# Altium PCB Neon-Demon-Earing-panel-revA.PcbDoc
Units mm, origin at the board's own origin, x right, y up, seen from the top; angles counter-clockwise.
Board outline 1.18 x 1.18 mm, 2 copper layers (Top Layer, Bottom Layer); 28 components, 6 nets, 76 pads, 20 vias.
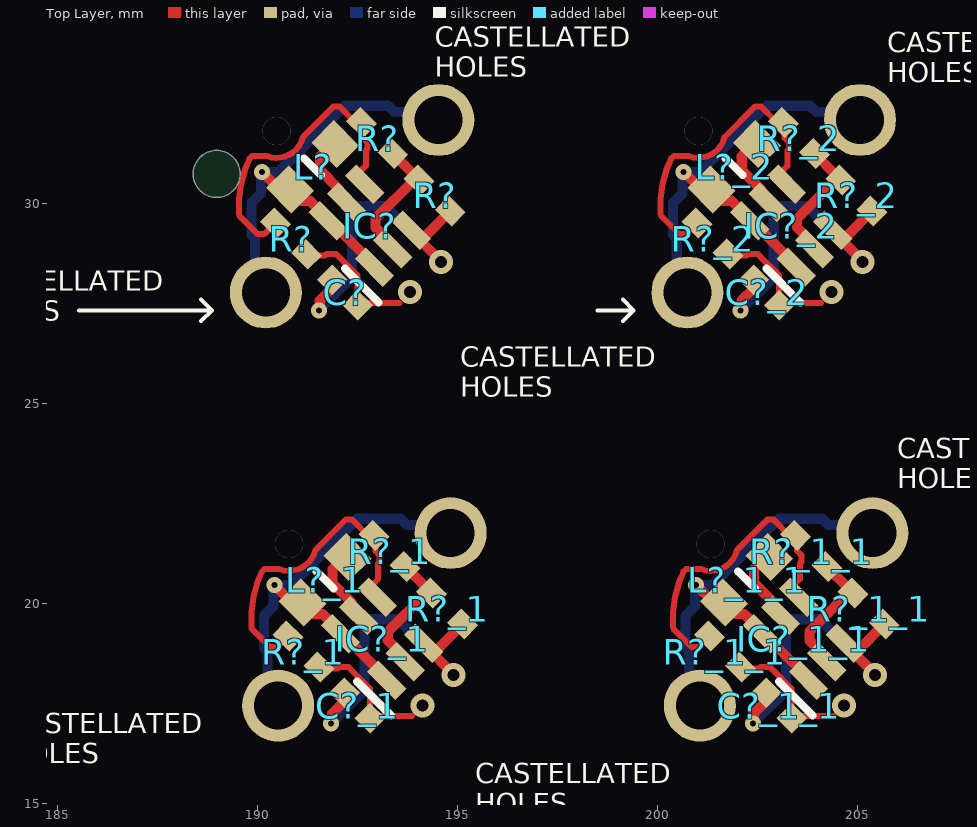
[diagram p0: Top Layer view]
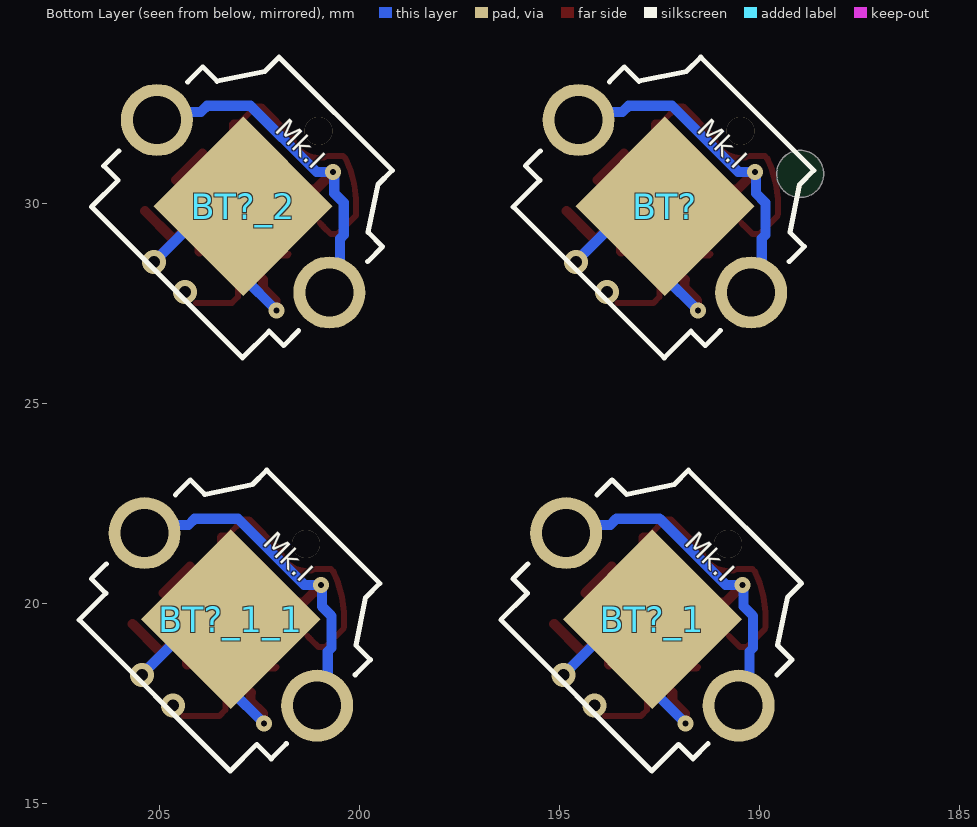
[diagram p1: Bottom Layer view, seen from below]

## Layer stack, top to bottom
Top Solder: solder mask 0.0102, Solder Resist, Dk 3.5
Top Layer: signal copper 0.0356
Dielectric 1: dielectric 0.32, FR-4, Dk 4.8
Bottom Layer: signal copper 0.0356
Bottom Solder: solder mask 0.0102, Solder Resist, Dk 3.5

## Board outline
188.386,30.734 ccw(c188.974,30.734) 188.974,30.146 ccw(c188.974,30.734) 189.562,30.734 ccw(c188.974,30.734) 188.974,31.322 ccw(c188.974,30.734)

## Design rules (kind name [scope] priority, off if disabled: settings)
BoardOutlineClearance [All] p1: gap=0.2 ignorepadtopadclearanceinfootprint=FALSE
Clearance [All] p1: gap=0.127 ignorepadtopadclearanceinfootprint=FALSE except(0.25: Arc-Hole Track-Hole SMDPad-Hole THPad-Hole Via-Hole Fill-Hole Poly-Hole Region-Hole Text-Hole)
ComponentClearance [All] p1: gap=0.127 collisioncheckmode=3 verticalgap=0.127 showdistances=TRUE
DiffPairsRouting [All] p1: maxlimit=0.254 minlimit=0.127 mostfreqgap=0.127 toplayer_minwidth=0.127 toplayer_maxwidth=25.4 toplayer_prefwidth=0.127 bottomlayer_minwidth=0.127 bottomlayer_maxwidth=25.4 bottomlayer_prefwidth=0.127 maxuncoupledlength=12.7
Height [All] p1: minheight=0 maxheight=1816.048 prefheight=12.7
HoleSize [All] p1: absolutevalues=TRUE maxlimit=6.3 minlimit=0.3 maxpercent=80.000 minpercent=20.000
HoleToHoleClearance [All] p1: gap=0.25 allowstackedmicrovias=FALSE
MinimumAnnularRing [All] p1: minimumring=0.076
MinimumSolderMaskSliver [All] p1: minsoldermaskwidth=0
PlaneClearance [All] p1: clearance=0.127
PlaneConnect PlaneConnectPowerPads [InPadClass('PowerPads')] p1: planeconnectstyle=Direct reliefexpansion=0.508 reliefentries=4 reliefconductorwidth=0.254 reliefairgap=0.254
PlaneConnect [All] p2: pad.planeconnectstyle=Relief pad.reliefexpansion=0.3 pad.reliefentries=4 pad.reliefconductorwidth=0.127 pad.reliefairgap=0.127 via.planeconnectstyle=Direct via.reliefexpansion=0.3 via.reliefentries=4 via.reliefconductorwidth=0.127 via.reliefairgap=0.127
PolygonConnect PolygonConnectPowerPads [All vs (InPadClass('PowerPads'))] p1: connectstyle=Direct reliefconductorwidth=0.254 reliefentries=4 polygonreliefangle="90 Angle" airgapwidth=0.254
PolygonConnect [All] p2: thpad.connectstyle=Relief thpad.reliefconductorwidth=0.127 thpad.reliefentries=4 thpad.polygonreliefangle="90 Angle" thpad.airgapwidth=0.127 smdpad.connectstyle=Relief smdpad.reliefconductorwidth=0.127 smdpad.reliefentries=4 smdpad.polygonreliefangle="90 Angle" smdpad.airgapwidth=0.127 via.connectstyle=Direct via.reliefconductorwidth=0.127 via.reliefentries=4 via.polygonreliefangle="90 Angle" via.airgapwidth=0.127
RoutingVias [All] p1: holewidth=0.3 width=0.6 viastyle="Through Hole" minholewidth=0.3 minwidth=0.6 maxholewidth=0.6 maxwidth=6.6
SilkToSilkClearance [All] p1: silktosilkclearance=0
SilkToSolderMaskClearance [IsPad] p1: minsilkscreentomaskgap=0.127 clearancetoexposedcopper=TRUE
SolderMaskExpansion [All] p1: expansion=0.075 istentingtop=FALSE
Width [All] p1: maxlimit=25.4 minlimit=0.127 preferedwidth=0.127 minimp=50.000000 maximp=50.000000 favimp=50.000000
20 further rules are at their usual default settings.

## Classes and differential pairs
component class Neon-Demon-Earing-revA: BT? C? IC? L? R?

## Components (designator, comment, footprint, x,y, rotation, side; value= is the part's Value field where it differs from the comment)
BT? "2987" BAT_2987 192.359,29.926 r225 bottom
BT?_1 "2987" BAT_2987 192.668,19.6 r225 bottom (schematic designator BT?)
BT?_1_1 "2987" BAT_2987 203.209,19.6 r225 bottom (schematic designator BT?)
BT?_2 "2987" BAT_2987 202.9,29.926 r225 bottom (schematic designator BT?)
C? "04023A0R8CAT2A" CAPC1005X56N 192.179,27.771 r135 top
C?_1 "04023A0R8CAT2A" CAPC1005X56N 192.489,17.444 r135 top (schematic designator C?)
C?_1_1 "04023A0R8CAT2A" CAPC1005X56N 203.03,17.444 r135 top (schematic designator C?)
C?_2 "04023A0R8CAT2A" CAPC1005X56N 202.72,27.771 r135 top (schematic designator C?)
IC? "TPS61222DCKR" SOT65P210X110-6N 192.777,29.464 r135 top
IC?_1 "TPS61222DCKR" SOT65P210X110-6N 193.086,19.138 r135 top (schematic designator IC?)
IC?_1_1 "TPS61222DCKR" SOT65P210X110-6N 203.627,19.138 r135 top (schematic designator IC?)
IC?_2 "TPS61222DCKR" SOT65P210X110-6N 203.318,29.464 r135 top (schematic designator IC?)
L? "AIML-0603-4R7K-T" INDC1608X95N 191.371,30.914 r45 top
L?_1 "AIML-0603-4R7K-T" INDC1608X95N 191.68,20.587 r45 top (schematic designator L?)
L?_1_1 "AIML-0603-4R7K-T" INDC1608X95N 202.221,20.587 r45 top (schematic designator L?)
L?_2 "AIML-0603-4R7K-T" INDC1608X95N 201.912,30.914 r45 top (schematic designator L?)
R? "CPF0402B100KE" RESC1005X35N 190.831,29.118 r135 top
R? "CPF0402B100KE" RESC1005X35N 192.987,31.632 r315 top
R? "CPF0402B100KE" RESC1005X35N 194.424,30.195 r135 top
R?_1 "CPF0402B100KE" RESC1005X35N 194.734,19.869 r135 top (schematic designator R?)
R?_1 "CPF0402B100KE" RESC1005X35N 193.297,21.306 r315 top (schematic designator R?)
R?_1 "CPF0402B100KE" RESC1005X35N 191.141,18.791 r135 top (schematic designator R?)
R?_1_1 "CPF0402B100KE" RESC1005X35N 201.682,18.791 r135 top (schematic designator R?)
R?_1_1 "CPF0402B100KE" RESC1005X35N 203.838,21.306 r315 top (schematic designator R?)
R?_1_1 "CPF0402B100KE" RESC1005X35N 205.275,19.869 r135 top (schematic designator R?)
R?_2 "CPF0402B100KE" RESC1005X35N 204.965,30.195 r135 top (schematic designator R?)
R?_2 "CPF0402B100KE" RESC1005X35N 203.528,31.632 r315 top (schematic designator R?)
R?_2 "CPF0402B100KE" RESC1005X35N 201.372,29.118 r135 top (schematic designator R?)

## Footprints (in the part's own frame and the unit in brackets; to place one, negate y for a bottom-side part, rotate by r counter-clockwise, add the part's x,y. Pads: shape width x height; smd on the part's side, far side on the other; paste and mask are expansions set on the pad)
BAT_2987 [mm]
  rect 3.17x3.17 smd paste-3: N(0,0)
  round 1.8 hole 1.2: P1(-3.05,0) P2(3.05,0)
  silkscreen extent -3.18,-2.69 3.18,3.27, body extent -3.43,-3.18 3.43,2.79, height 2.79
CAPC1005X56N [mm]
  rect 0.55x0.54 smd: 1(-0.45,0) 2(0.45,0)
  body extent -0.5,-0.25 0.5,0.25, height 0.56
INDC1608X95N [mm]
  rect 0.8x0.9 smd: 1(-0.8,0) 2(0.8,0)
  silkscreen extent 0,-0.3 0,0.3, body extent -0.8,-0.4 0.8,0.4, height 0.95
RESC1005X35N [mm]
  rect 0.6x0.5 smd: 1(-0.55,0) 2(0.55,0)
  body extent -0.5,-0.25 0.5,0.25, height 0.35
SOT65P210X110-6N [mm]
  rect 1x0.4 smd: 1(-0.85,0.65) 2(-0.85,0) 3(-0.85,-0.65) 4(0.788,-0.65) 5(0.788,0) 6(0.788,0.65)
  silkscreen extent -1.55,1.2 -0.35,1.2, body extent -1.05,-1 1.05,1, height 1

## Part data
BT? BT?_1 BT?_1_1 BT?_2: Package=None, Availability=Unavailable, MP=2987, Price=None
C? C?_1 C?_1_1 C?_2: "Capacitor", Manufacturer_Name=AVX, Mouser Part Number=581-04023A0R8CAT2A, Datasheet Link=http://www.mouser.com/catalog/supplier/library/pdf/AVXSurfaceMountCeramic.pdf, Height=0.56mm, Manufacturer_Part_Number=04023A0R8CAT2A, Mouser Price/Stock=https://www.mouser.co.uk/ProductDetail/AVX/04023A0R8CAT2A?qs=ZwvTZoB9SO%252BVBOZ%252BNMbjzw%3D%3D
IC? IC?_1 IC?_1_1 IC?_2: "Integrated Circuit", Manufacturer_Name="Texas Instruments", Mouser Part Number=595-TPS61222DCKR, Arrow Part Number=TPS61222DCKR, Arrow Price/Stock=https://www.arrow.com/en/products/tps61222dckr/texas-instruments?region=nac, Datasheet Link=https://www.ti.com/lit/gpn/TPS61222, Height=1.1mm, Manufacturer_Part_Number=TPS61222DCKR, Mouser Price/Stock=https://www.mouser.co.uk/ProductDetail/Texas-Instruments/TPS61222DCKR?qs=IDSsxkoac0xpx0kmXXJcTA%3D%3D
L? L?_1 L?_1_1 L?_2: "Inductor", Manufacturer_Name=ABRACON, Mouser Part Number=815-AIML-0603-4R7KT, Arrow Part Number=AIML-0603-4R7K-T, Arrow Price/Stock=https://www.arrow.com/en/products/aiml-0603-4r7k-t/abracon?region=nac, Datasheet Link=https://abracon.com/Magnetics/new/AIML-0603.pdf, Height=0.95mm, Manufacturer_Part_Number=AIML-0603-4R7K-T, Mouser Price/Stock=https://www.mouser.co.uk/ProductDetail/ABRACON/AIML-0603-4R7K-T?qs=1vO2EIVe%252BY6wRO9cxMI0hw%3D%3D
R? R? R? R?_1 R?_1 R?_1 R?_1_1 R?_1_1 R?_1_1 R?_2 R?_2 R?_2: "Resistor", Manufacturer_Name="TE Connectivity", Mouser Part Number=279-CPF0402B100KE, Arrow Part Number=CPF0402B100KE, Arrow Price/Stock=https://www.arrow.com/en/products/cpf0402b100ke/te-connectivity?region=nac, Datasheet Link=http://www.farnell.com/datasheets/1786775.pdf, Height=0.35mm, Manufacturer_Part_Number=CPF0402B100KE, Mouser Price/Stock=https://www.mouser.co.uk/ProductDetail/TE-Connectivity-Holsworthy/CPF0402B100KE?qs=CXI0wBT1M2h4W2Gm72yIGA%3D%3D

## Via types
v1: diameter 0.6, hole 0.3, Top Layer to Bottom Layer, 8 vias
v2: diameter 0.4, hole 0.15, Top Layer to Bottom Layer, tented both sides, 8 vias
v3: diameter 0.7, hole 0.7, Top Layer to Bottom Layer, 4 vias

## Nets (pads, with @x,y where several pads share a name; then routed paths per layer and width w, separated by ;. In a path a pad name is that pad's centre, name@x,y a point inside that pad or via, vN(x,y) a via of type N, cw(c..) or ccw(c..) an arc to the next point about the centre after c; other vN are vias at no path point)
3V3: C?.1 R?.1@191.22,28.729 | length 3.2
  Top Layer w0.15: R?.1@191.22,28.729 191.255,28.693 191.683,28.693 191.718,28.728 191.963,28.728 192.011,28.68 192.494,28.197 192.494,27.658 192.639,27.513 193.543,27.513
  other v1: 193.807,27.776
GND: BT?.N C?.2 IC?.3 R?.1@194.813,29.806 | length 8.9
  Top Layer w0.254: v2@191.551,27.322 191.551,27.569 191.865,27.883 191.865,28.085 C?.2 ; v1(194.584,28.536) 194.584,28.556 193.908,29.232 193.908,29.252 194.032,29.128 194.135,29.128 R?.1@194.813,29.806
  Bottom Layer w0.254: v2(191.526,27.322) 192.359,28.154 BT?.N 193.194,29.926 v1(194.584,28.536)
NetIC?_2: IC?.2 R?.2@193.376,31.243 R?.2@194.035,30.584 | length 3.4
  Top Layer w0.254: R?.2@193.376,31.243 193.913,30.706 R?.2@194,30.619 ; IC?.2@193.448,28.792 193.448,28.895 192.941,29.403 192.941,29.613 193.911,30.584 R?.2@194.035,30.584
NetIC?_4: IC?.4 R?.1@192.598,32.021 R?.2@190.442,29.507 | length 7.8
  Top Layer w0.15: R?.2@190.442,29.507 190.398,29.462 190.353,29.417 190.165,29.229 190.002,29.229 189.54,29.691 189.534,29.741 189.534,30.111 189.582,30.478 189.678,30.836 189.702,30.895 189.783,31.09 189.795,31.118 189.86,31.183 190.227,31.183 ccw(c190.473,31.812) 191.13,31.655 191.899,32.424 192.039,32.424 192.442,32.021 192.598,32.021 192.634,31.986 192.634,31.633 192.74,31.528 192.74,31.36 192.702,31.322 192.702,30.934 192.552,30.784 192.552,30.608 IC?.4@192.565,30.595
NetIC?_5: IC?.5 L?.2 | length 1.4
  Top Layer w0.254: L?.2@191.703,31.327 191.559,31.184 191.559,30.823 192.046,30.336 IC?.5@192.046,30.238
VBAT: BT?.P1 BT?.P2 IC?.1 IC?.6 L?.1 | length 11.8
  Top Layer w0.254: v2(190.109,30.781) 190.542,30.348 L?.1 191.092,30.062 191.304,30.062 IC?.1@192.93,28.435
  Bottom Layer w0.254: BT?.P2@189.934,28.13 189.934,29.118 189.844,29.207 189.844,30.012 190.081,30.249 190.081,30.753 v2(190.109,30.781) ; v2@190.109,30.786 190.525,30.786 192.179,32.44 193.26,32.44 193.415,32.285 194.313,32.285 BT?.P1
pads on no net: BT?_1.N BT?_1.P1 BT?_1.P2 BT?_1_1.N BT?_1_1.P1 BT?_1_1.P2 BT?_2.N BT?_2.P1 BT?_2.P2 C?_1.1 C?_1.2 C?_1_1.1 C?_1_1.2 C?_2.1 C?_2.2 IC?_1.1 IC?_1.2 IC?_1.3 IC?_1.4 IC?_1.5 IC?_1.6 IC?_1_1.1 IC?_1_1.2 IC?_1_1.3 IC?_1_1.4 IC?_1_1.5 IC?_1_1.6 IC?_2.1 IC?_2.2 IC?_2.3 IC?_2.4 IC?_2.5 IC?_2.6 L?_1.1 L?_1.2 L?_1_1.1 L?_1_1.2 L?_2.1 L?_2.2 R?_1.1 R?_1.2 R?_1_1.1 R?_1_1.2 R?_2.1 R?_2.2
copper on no net: | length 109.4
  Top Layer w0.15: 190.752,19.18 190.708,19.136 190.662,19.091 190.474,18.903 190.312,18.903 189.85,19.365 189.843,19.414 189.843,19.785 189.891,20.152 189.987,20.51 190.012,20.569 190.093,20.764 190.104,20.792 190.169,20.857 190.536,20.857 ccw(c190.782,21.485) 191.439,21.329 192.208,22.098 192.348,22.098 192.751,21.695 192.908,21.695 192.943,21.659 192.943,21.307 193.049,21.201 193.049,21.034 193.011,20.996 193.011,20.608 192.861,20.458 192.861,20.282 192.874,20.269 ; 191.53,18.403 191.565,18.367 191.993,18.367 192.028,18.402 192.272,18.402 192.32,18.354 192.803,17.871 192.803,17.332 192.949,17.187 193.853,17.187 ; 200.983,29.507 200.939,29.462 200.894,29.417 200.706,29.229 200.543,29.229 200.081,29.691 200.075,29.741 200.075,30.111 200.123,30.478 200.219,30.836 200.243,30.895 200.324,31.09 200.336,31.118 200.401,31.183 200.768,31.183 ccw(c201.014,31.812) 201.671,31.655 202.44,32.424 202.58,32.424 202.983,32.021 203.139,32.021 203.175,31.986 203.175,31.633 203.281,31.528 203.281,31.36 203.243,31.322 203.243,30.934 203.093,30.784 203.093,30.608 203.106,30.595 ; 201.293,19.18 201.249,19.136 201.203,19.091 201.015,18.903 200.853,18.903 200.391,19.365 200.384,19.414 200.384,19.785 200.432,20.152 200.528,20.51 200.553,20.569 200.634,20.764 200.645,20.792 200.71,20.857 201.077,20.857 ccw(c201.323,21.485) 201.98,21.329 202.749,22.098 202.889,22.098 203.292,21.695 203.449,21.695 203.484,21.659 203.484,21.307 203.59,21.201 203.59,21.034 203.552,20.996 203.552,20.608 203.402,20.458 203.402,20.282 203.415,20.269 ; 201.761,28.729 201.796,28.693 202.224,28.693 202.259,28.728 202.504,28.728 202.552,28.68 203.035,28.197 203.035,27.658 203.18,27.513 204.084,27.513 ; 202.071,18.403 202.106,18.367 202.534,18.367 202.569,18.402 202.813,18.402 202.861,18.354 203.344,17.871 203.344,17.332 203.49,17.187 204.394,17.187
  Top Layer w0.254: v2(190.418,20.455) 190.851,20.022 191.115,20.022 191.401,19.735 191.613,19.735 193.24,18.109 ; v2@191.86,16.995 191.86,17.243 192.174,17.557 192.174,17.759 192.17,17.763 ; 192.012,21.001 191.869,20.858 191.869,20.497 192.356,20.01 192.356,19.912 ; 193.686,20.917 194.222,20.38 194.309,20.293 ; 193.758,18.466 193.758,18.569 193.25,19.077 193.25,19.287 194.221,20.258 194.345,20.258 ; v1(194.893,18.21) 194.893,18.23 194.217,18.905 194.217,18.925 194.341,18.802 194.444,18.802 195.123,19.48 ; v2(200.65,30.781) 201.083,30.348 201.346,30.348 201.633,30.062 201.845,30.062 203.471,28.435 ; v2(200.959,20.455) 201.392,20.022 201.656,20.022 201.942,19.735 202.154,19.735 203.781,18.109 ; v2@202.092,27.322 202.092,27.569 202.406,27.883 202.406,28.085 202.402,28.089 ; 202.244,31.327 202.1,31.184 202.1,30.823 202.587,30.336 202.587,30.238 ; v2@202.401,16.995 202.401,17.243 202.715,17.557 202.715,17.759 202.711,17.763 ; 202.553,21.001 202.41,20.858 202.41,20.497 202.897,20.01 202.897,19.912 ; 203.917,31.243 204.454,30.706 204.541,30.619 ; 203.989,28.792 203.989,28.895 203.482,29.403 203.482,29.613 204.452,30.584 204.576,30.584 ; 204.227,20.917 204.763,20.38 204.85,20.293 ; 204.299,18.466 204.299,18.569 203.791,19.077 203.791,19.287 204.762,20.258 204.886,20.258 ; v1(205.125,28.536) 205.125,28.556 204.449,29.232 204.449,29.252 204.573,29.128 204.676,29.128 205.354,29.806 ; v1(205.434,18.21) 205.434,18.23 204.758,18.905 204.758,18.925 204.882,18.802 204.985,18.802 205.664,19.48
  Bottom Layer w0.254: 190.244,17.804 190.244,18.791 190.154,18.881 190.154,19.686 190.39,19.923 190.39,20.427 v2(190.418,20.455) ; v2@190.418,20.46 190.834,20.46 192.489,22.114 193.569,22.114 193.724,21.959 194.622,21.959 194.825,21.756 ; v2(191.836,16.995) 192.668,17.828 192.668,19.6 193.503,19.6 v1(194.893,18.21) ; 200.475,28.13 200.475,29.118 200.385,29.207 200.385,30.012 200.622,30.249 200.622,30.753 v2(200.65,30.781) ; v2@200.65,30.786 201.066,30.786 202.72,32.44 203.801,32.44 203.956,32.285 204.854,32.285 205.056,32.082 ; 200.785,17.804 200.785,18.791 200.695,18.881 200.695,19.686 200.931,19.923 200.931,20.427 v2(200.959,20.455) ; v2@200.959,20.46 201.375,20.46 203.03,22.114 204.11,22.114 204.265,21.959 205.163,21.959 205.366,21.756 ; v2(202.067,27.322) 202.9,28.154 202.9,29.926 203.735,29.926 v1(205.125,28.536) ; v2(202.377,16.995) 203.209,17.828 203.209,19.6 204.044,19.6 v1(205.434,18.21)
  other v1: 194.116,17.45 204.657,17.45 204.348,27.776
  other v3: 190.782,21.485 201.323,21.485 190.473,31.812 201.014,31.812

## Silkscreen, mask and mechanical layers (free items; w line width, h text height)
Top Overlay:
  lines w0.1: 185.537,27.319 187.95,27.319 ; 187.958,27.322 188.856,27.322 ; 188.587,27.052 188.856,27.322 ; 198.499,27.322 199.397,27.322 ; 199.128,27.052 199.397,27.322 ; 188.856,27.322 188.587,27.591 188.856,27.322 ; 199.397,27.322 199.128,27.591 199.397,27.322
  text "CASTELLATED  / HOLES" at 194.427,33.161 h0.5
  text "CASTELLATED  / HOLES" at 205.74,33.02 h0.5
  text "CASTELLATED  / HOLES" at 182.743,27.065 h0.5
  text "CASTELLATED  / HOLES" at 195.062,25.16 h0.5
  text "CASTELLATED  / HOLES" at 205.984,22.874 h0.5
  text "CASTELLATED  / HOLES" at 183.713,16.003 h0.5
  text "CASTELLATED  / HOLES" at 195.443,14.746 h0.5
Bottom Overlay:
  text "Mk.I" at 191.589,31.812 h0.5 r45
  text "Mk.I" at 202.13,31.812 h0.5 r45
  text "Mk.I" at 191.898,21.485 h0.5 r45
  text "Mk.I" at 202.439,21.485 h0.5 r45
Board:
  circle w0.1: c200.716,27.741 r0.588
  circle w0.1: c205.054,32.08 r0.588
  circle w0.1: c205.056,32.082 r0.588
  circle w0.1: c201.026,17.415 r0.588
  circle w0.1: c205.366,21.756 r0.588
  circle w0.1: c205.363,21.753 r0.588
  circle w0.1: c194.822,21.753 r0.588
  circle w0.1: c194.825,21.756 r0.588
  circle w0.1: c190.485,17.415 r0.588
  circle w0.1: c194.515,32.082 r0.588
  circle w0.1: c194.513,32.08 r0.588
  circle w0.1: c190.175,27.741 r0.588
  lines w0.05: 189.769,28.222 cw(c192.327,29.973) 194.08,32.529 ; 190.078,17.896 cw(c192.636,19.646) 191.649,22.585 ; 190.635,27.375 ccw(c192.327,29.973) 191.648,26.948 ; 190.945,17.049 ccw(c192.636,19.646) 195.421,18.284 ; 191.643,22.606 191.643,26.924 ; 193.414,27.069 ccw(c192.327,29.973) 195.137,28.663 ; 193.417,22.646 cw(c192.636,19.646) 194.082,22.389 ; 193.421,22.662 193.421,27.051 ; 195.101,31.323 cw(c192.312,29.97) 195.376,30.442 ; 195.133,28.659 200.03,28.669 ; 195.406,30.446 199.795,30.446 ; 195.418,21.015 cw(c192.636,19.646) 195.707,20.073 ; 195.453,18.288 200.35,18.298 ; 195.726,20.075 200.115,20.075 ; 199.804,30.445 cw(c202.868,29.973) 204.621,32.529 ; 200.051,28.678 ccw(c202.868,29.973) 200.14,28.5 ; 200.107,20.075 cw(c203.177,19.646) 202.191,22.585 ; 200.383,18.305 ccw(c203.177,19.646) 200.619,17.896 ; 201.176,27.375 ccw(c202.868,29.973) 202.189,26.948 ; 201.486,17.049 ccw(c203.177,19.646) 205.758,21.364 ; 202.184,22.606 202.184,26.924 ; 203.958,22.646 cw(c203.177,19.646) 204.623,22.389 ; 203.961,27.072 ccw(c202.868,29.973) 205.657,31.325 ; 203.962,22.662 203.962,27.051